# Altium PCB Konwerter_USB_RS232_4porty.PcbDoc
Units mil, origin at the board's own origin, x right, y up, seen from the top; angles counter-clockwise.
Board outline 6000 x 4000 mil, 4 copper layers (Top Layer, InternalPlane1, Internal Plane 2, Bottom Layer); 57 components, 106 nets, 328 pads, 162 vias.
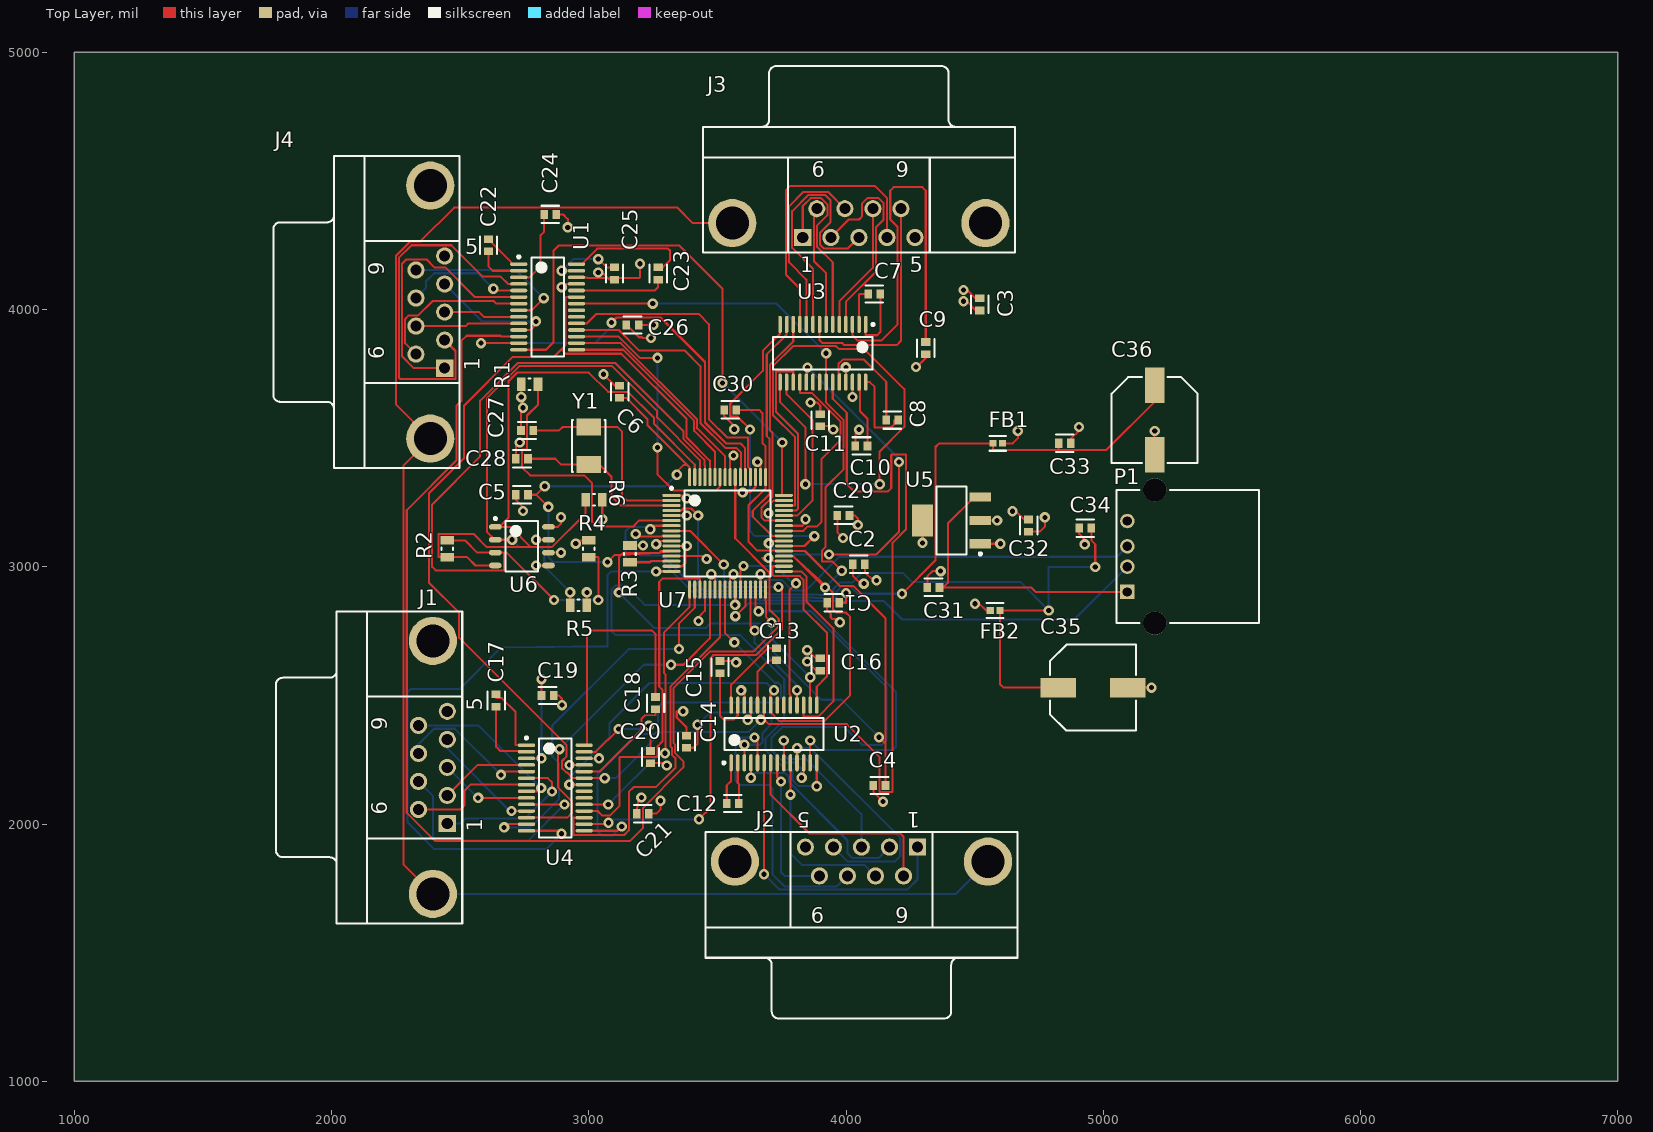
[diagram p0: Top Layer view]
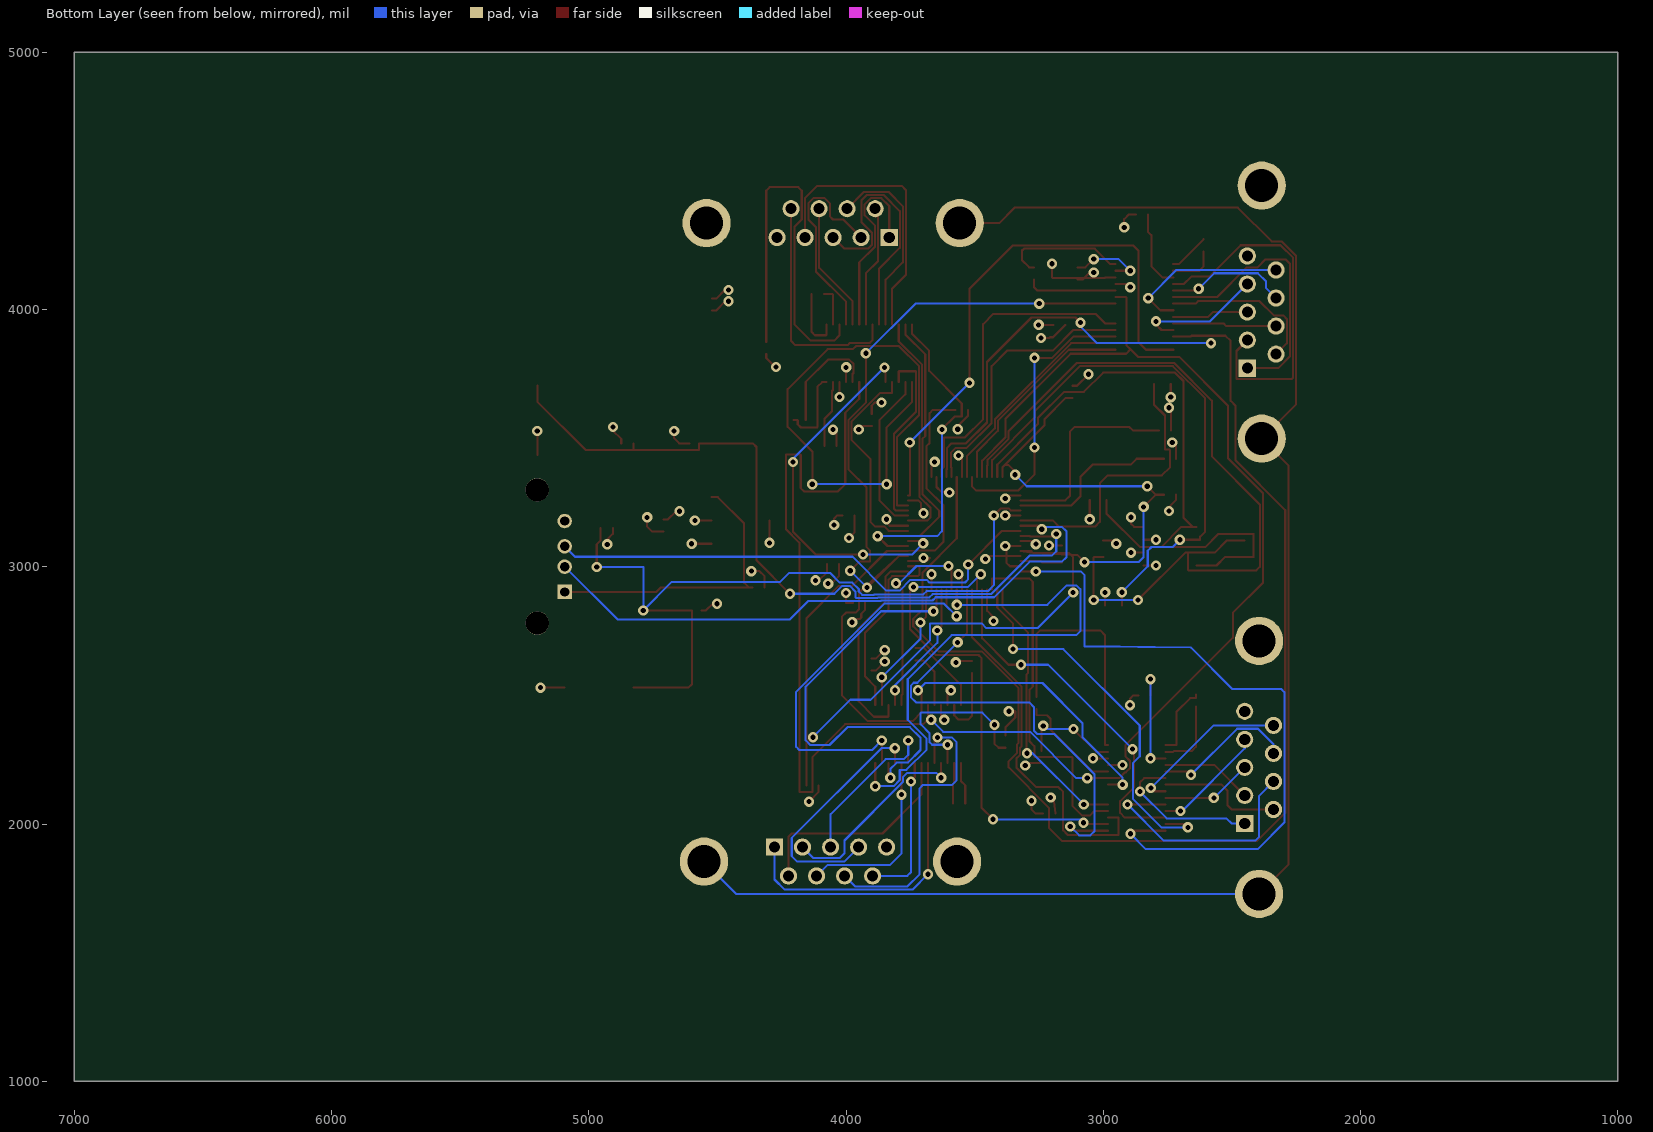
[diagram p1: Bottom Layer view, seen from below]
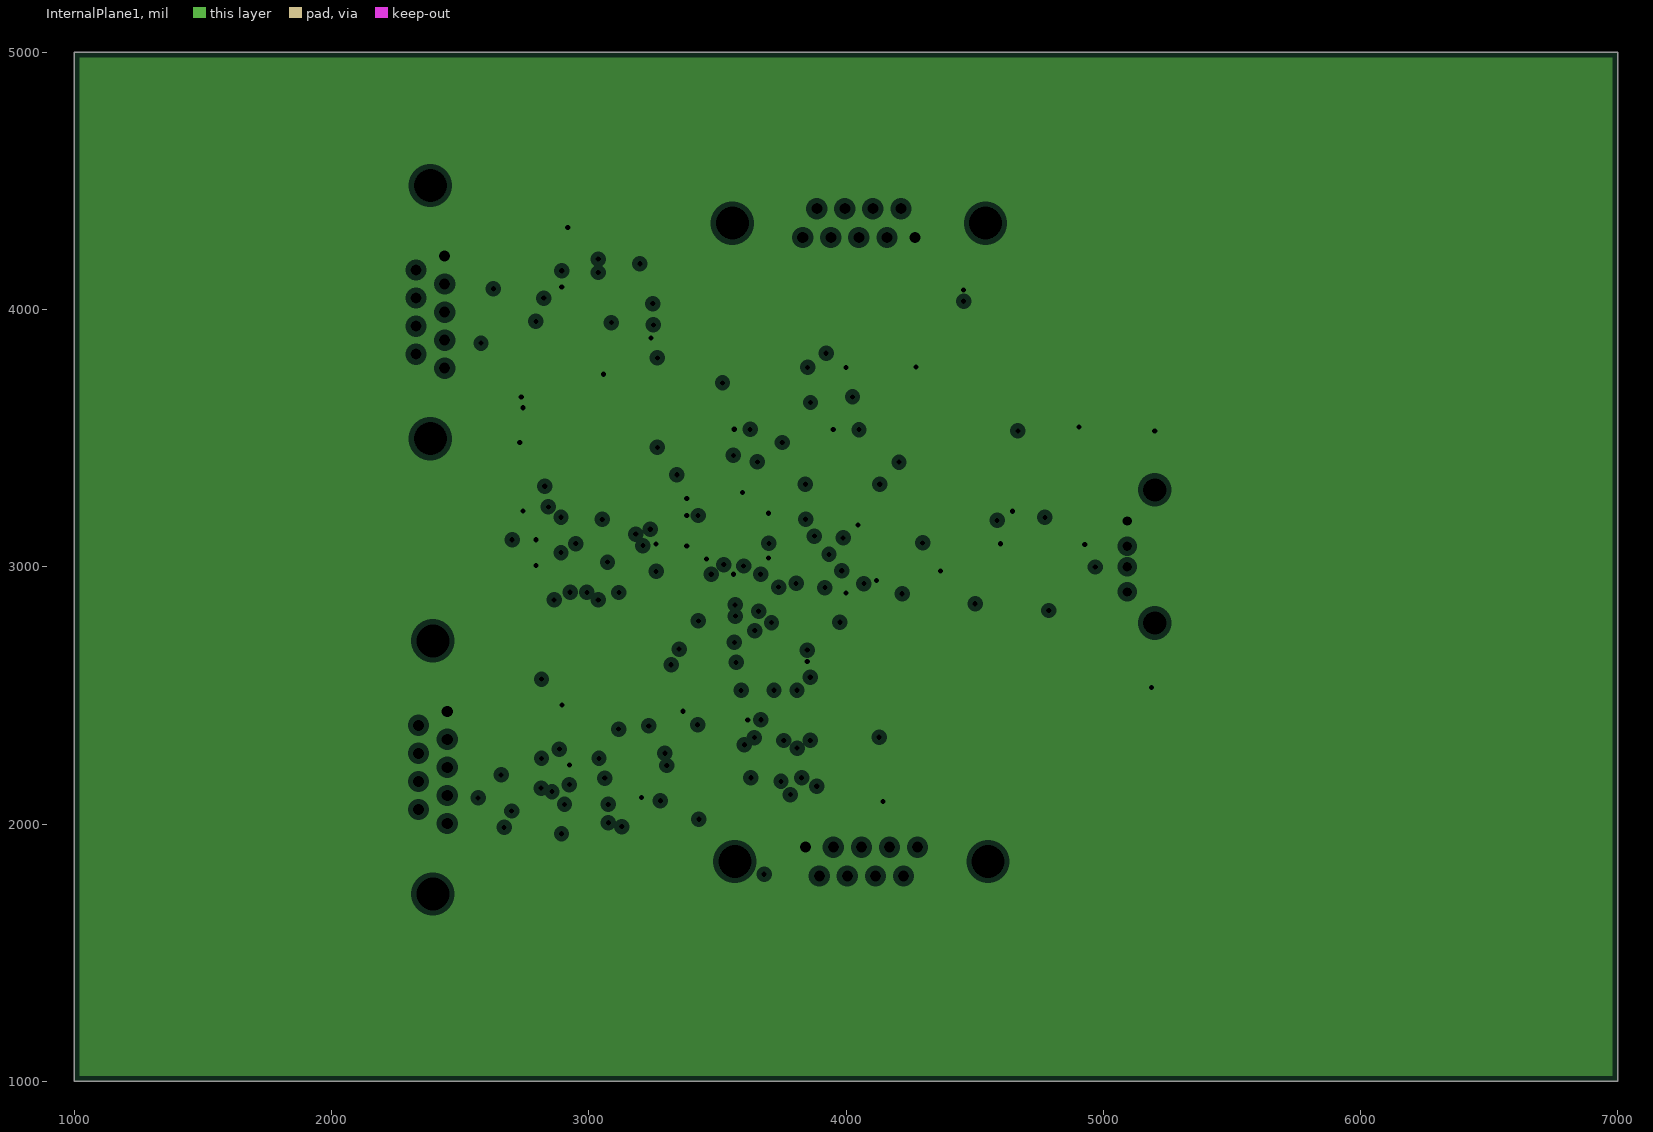
[diagram p2: InternalPlane1, clearances drawn from the general rule]
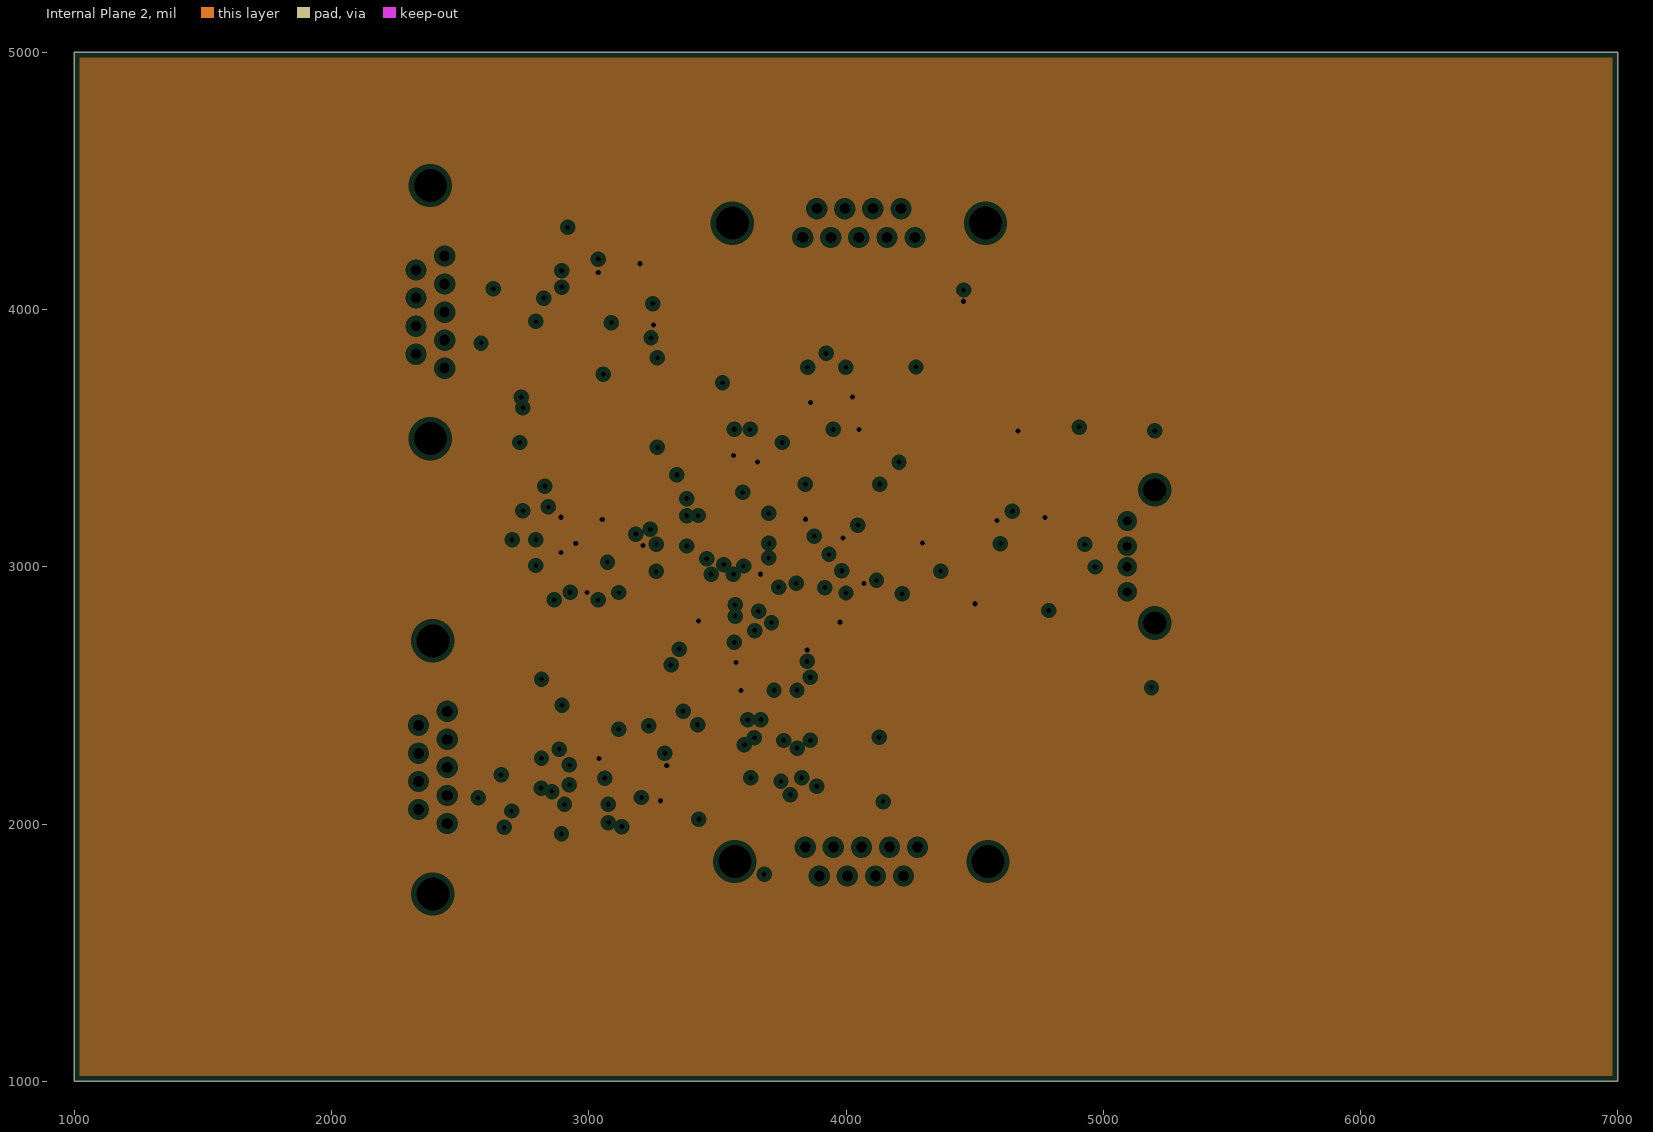
[diagram p3: Internal Plane 2, clearances drawn from the general rule]
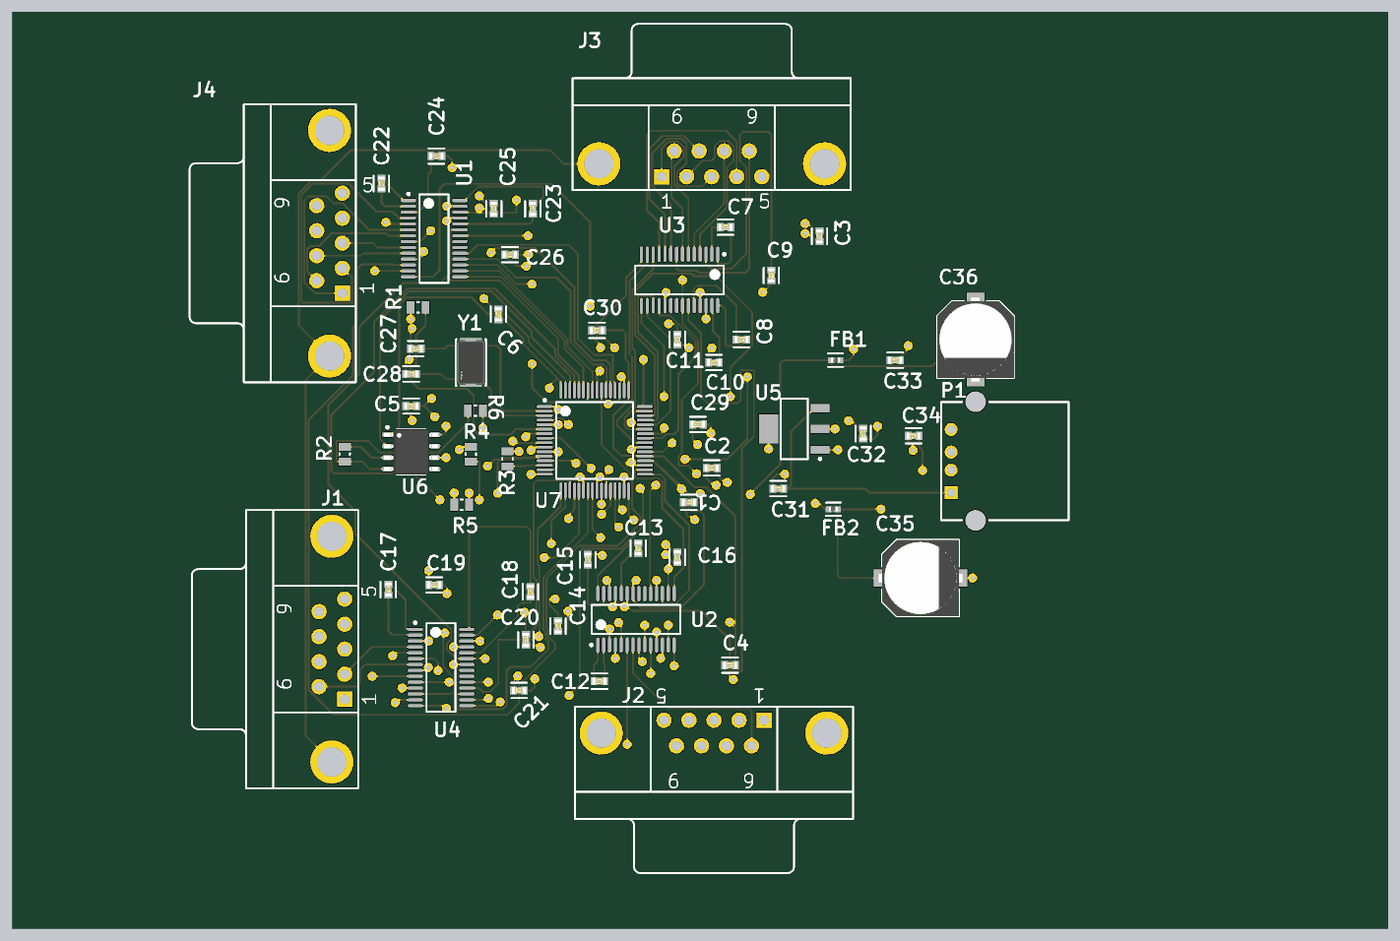
[diagram p4: 3D render of the assembled board from above, using the file's embedded part models]

## Layer stack, top to bottom
Top Layer: signal copper 1.4
Dielectric: core 12.6, FR-4, Dk 4.8
InternalPlane1: plane copper 1.4, net GND
Dielectric: prepreg 12.6, FR-4, Dk 4.8
Internal Plane 2: plane copper 1.4, net 3.3V
Dielectric: core 12.6, FR-4, Dk 4.8
Bottom Layer: signal copper 1.4

## Board outline
1000,1000 7000,1000 7000,5000 1000,5000

## Design rules (kind name [scope] priority, off if disabled: settings)
Clearance [All] p1: gap=4
HoleSize [All] p1: absolutevalues=TRUE maxlimit=1000 minlimit=1 maxpercent=80.000 minpercent=20.000
HoleToHoleClearance [All] p1: gap=8 allowstackedmicrovias=TRUE
MinimumSolderMaskSliver [All] p1: minsoldermaskwidth=1
PlaneClearance [All] p1: clearance=20
PlaneConnect [All] p1: planeconnectstyle=Relief reliefexpansion=20 reliefentries=4 reliefconductorwidth=10 reliefairgap=10
PolygonConnect [All] p1: connectstyle=Relief reliefconductorwidth=10 reliefentries=4 polygonreliefangle="90 Angle" airgapwidth=10
RoutingVias [All] p1: holewidth=20 width=40 viastyle="Through Hole" minholewidth=20 minwidth=40 maxholewidth=20 maxwidth=40
SilkToSilkClearance [All] p1: silktosilkclearance=8
SilkToSolderMaskClearance [IsPad] p1: minsilkscreentomaskgap=4 clearancetoexposedcopper=TRUE
SolderMaskExpansion [All] p1: expansion=4
Width [All] p1: maxlimit=8 minlimit=8 preferedwidth=8
21 further rules are at their usual default settings.

## Components (designator, comment, footprint, x,y, rotation, side; value= is the part's Value field where it differs from the comment)
C1 "100nF" FP-C0603C-CF-MFG 3950,2860 r0 top
C2 "100nF" FP-C0603C-CF-MFG 4050,3010 r0 top
C3 "100nF" FP-C0603C-CF-MFG 4520,4020 r90 top
C4 "100nF" FP-C0603C-CF-MFG 4130,2150 r180 top
C5 "100nF" FP-C0603C-CF-MFG 2740,3280 r180 top
C6 "100nF" FP-C0603C-CF-MFG 3120,3680 r90 top
C7 "100nF" FP-C0603C-CF-MFG 4110,4060 r180 top
C8 "100nF" FP-C0603C-CF-MFG 4180,3570 r180 top
C9 "100nF" FP-C0603C-CF-MFG 4310,3850 r270 top
C10 "100nF" FP-C0603C-CF-MFG 4060,3470 r0 top
C11 "100nF" FP-C0603C-CF-MFG 3900,3570 r90 top
C12 "100nF" FP-C0603C-CF-MFG 3560,2080 r0 top
C13 "100nF" FP-C0603C-CF-MFG 3730,2660 r270 top
C14 "100nF" FP-C0603C-CF-MFG 3380,2320 r90 top
C15 "100nF" FP-C0603C-CF-MFG 3510,2610 r270 top
C16 "100nF" FP-C0603C-CF-MFG 3900,2620 r90 top
C17 "100nF" FP-C0603C-CF-MFG 2640,2480 r270 top
C18 "100nF" FP-C0603C-CF-MFG 3260,2470 r270 top
C19 "100nF" FP-C0603C-CF-MFG 2840,2500 r0 top
C20 "100nF" FP-C0603C-CF-MFG 3240,2260 r90 top
C21 "100nF" FP-C0603C-CF-MFG 3210,2040 r0 top
C22 "100nF" FP-C0603C-CF-MFG 2610,4250 r270 top
C23 "100nF" FP-C0603C-CF-MFG 3270,4140 r270 top
C24 "100nF" FP-C0603C-CF-MFG 2850,4370 r0 top
C25 "100nF" FP-C0603C-CF-MFG 3100,4140 r90 top
C26 "100nF" FP-C0603C-CF-MFG 3170,3940 r0 top
C27 "27pF" FP-C0603C-CF-MFG 2760,3530 r180 top
C28 "27pF" FP-C0603C-CF-MFG 2740,3420 r180 top
C29 "100nF" FP-C0603C-CF-MFG 3990,3200 r0 top
C30 "100nF" FP-C0603C-CF-MFG 3550,3610 r180 top
C31 "100nF" FP-C0603C-CF-MFG 4340,2920 r180 top
C32 "100nF" FP-C0603C-CF-MFG 4710,3160 r90 top
C33 "100nF" FP-C0603C-CF-MFG 4850,3480 r0 top
C34 "100nF" FP-C0603C-CF-MFG 4930,3150 r180 top
C35 "2.7uF" NIC-UCL1V101MNL1GS_L 4960,2530 r0 top
C36 "2.7uF" NIC-UCL1V101MNL1GS_L 5200,3570 r270 top
FB1 "Koralik" FP-BLM15-0_05-IPC_A 4590,3480 r180 top
FB2 "Koralik" FP-BLM15-0_05-IPC_A 4580,2830 r0 top
J1 "D Connector 9" DSUB1.385-2H9 2020,2220 r90 top
J2 "D Connector 9" DSUB1.385-2H9 4060,1480 r180 top
J3 "D Connector 9" DSUB1.385-2H9 4050,4710 r0 top
J4 "D Connector 9" DSUB1.385-2H9 2010,3990 r90 top
P1 "USB-A1HSW6" OST_USB-A1HSW6 5350,3040 r90 top
R1 "12k" RESC2013X50X30LL20T20 2770,3710 r0 top
R2 "2.2k" RESC2013X50X30LL20T20 2450,3070 r270 top
R3 "1k" RESC2013X50X30LL20T20 3160,3050 r270 top
R4 "10k" RESC2013X50X30LL20T20 3000,3070 r90 top
R5 "10k" RESC2013X50X30LL20T20 2960,2850 r0 top
R6 "10k" RESC2013X50X30LL20T20 3020,3260 r0 top
U1 "MAX3241EUI" TSSOP28_N 2840,4010 r0 top
U2 "MAX3241EUI" TSSOP28_N 3720,2350 r90 top
U3 "MAX3241EUI" TSSOP28_N 3910,3830 r270 top
U4 "MAX3241EUI" TSSOP28_N 2870,2140 r0 top
U5 "LD1117S-3.3" SOT-223_L 4410,3180 r180 top
U6 "93C46" ATML-8S1_B_L 2740,3080 r0 top
U7 "FT4232HL-Reel" LQFP-64_N 3540,3130 r0 top
Y1 "12MHz" FP-7A-MFG 3000,3470 r270 top

## Footprints (in the part's own frame and the unit in brackets; to place one, negate y for a bottom-side part, rotate by r counter-clockwise, add the part's x,y. Pads: shape width x height; smd on the part's side, far side on the other; paste and mask are expansions set on the pad)
ATML-8S1_B_L [mm] "SOIC, 8-Leads, Body 5x4mm, Pitch 1.27mm, IPC High Density"
  oval 1.25x0.55 smd: 1(-2.625,1.905) 2(-2.625,0.635) 3(-2.625,-0.635) 4(-2.625,-1.905) 5(2.625,-1.905) 6(2.625,-0.635) 7(2.625,0.635) 8(2.625,1.905)
  silkscreen extent -2.75,-2.5 1.6,2.85, body extent -3,-2.5 3,2.5, height 1.75
DSUB1.385-2H9 [mm] "Connector; D Subminiature; 9 Position; Right Angle; Pitch 1.385 mm"
  rect 1.69x1.69 hole 1.09: 1(-5.54,-10.92)
  round 1.69 hole 1.09: 2(-2.77,-10.92) 3(0,-10.92) 4(2.77,-10.92) 5(5.54,-10.92) 6(-4.155,-8.08) 7(-1.385,-8.08) 8(1.385,-8.08) 9(4.155,-8.08)
  round 4.76 hole 3.26: 10(-12.495,-9.5) 11(12.495,-9.5)
  silkscreen extent -15.4,-12.4 15.4,6
FP-7A-MFG [mm]
  rect 1.7x2.4 smd paste+0 mask+0: 1(-1.85,0) 2(1.85,0)
  silkscreen extent -2.58,-1.67 2.58,1.67, body extent -2.8,-1.78 2.8,1.78, height 0.25
FP-BLM15-0_05-IPC_A [mil]
  rect 28.16x26.48 smd paste+0 mask+0: 1(-18.84,0) 2(18.84,0)
  silkscreen extent -33,-29 33,29, body extent -41,-21 41,21, height 10
FP-C0603C-CF-MFG [mm]
  rect 0.75x0.9 smd paste+0 mask+0: 1(-0.6,0) 2(0.6,0)
  silkscreen extent -0.87,-0.85 0.88,0.85, body extent -1.2,-0.6 1.2,0.6, height 0.25
LQFP-64_N [mm] "Thin QFP, 64-Leads, Body 10x10mm, Pitch 0.5mm, IPC Medium Density"
  oval 1.8x0.3 smd: 1(-5.55,3.75) 2(-5.55,3.25) 3(-5.55,2.75) 4(-5.55,2.25) 5(-5.55,1.75) 6(-5.55,1.25) 7(-5.55,0.75) 8(-5.55,0.25) 9(-5.55,-0.25) 10(-5.55,-0.75) 11(-5.55,-1.25) 12(-5.55,-1.75) 13(-5.55,-2.25) 14(-5.55,-2.75) 15(-5.55,-3.25) 16(-5.55,-3.75) 33(5.55,-3.75) 34(5.55,-3.25) 35(5.55,-2.75) 36(5.55,-2.25) 37(5.55,-1.75) 38(5.55,-1.25) 39(5.55,-0.75) 40(5.55,-0.25) 41(5.55,0.25) 42(5.55,0.75) 43(5.55,1.25) 44(5.55,1.75) 45(5.55,2.25) 46(5.55,2.75) 47(5.55,3.25) 48(5.55,3.75)
  oval 0.3x1.8 smd: 17(-3.75,-5.55) 18(-3.25,-5.55) 19(-2.75,-5.55) 20(-2.25,-5.55) 21(-1.75,-5.55) 22(-1.25,-5.55) 23(-0.75,-5.55) 24(-0.25,-5.55) 25(0.25,-5.55) 26(0.75,-5.55) 27(1.25,-5.55) 28(1.75,-5.55) 29(2.25,-5.55) 30(2.75,-5.55) 31(3.25,-5.55) 32(3.75,-5.55) 49(3.75,5.55) 50(3.25,5.55) 51(2.75,5.55) 52(2.25,5.55) 53(1.75,5.55) 54(1.25,5.55) 55(0.75,5.55) 56(0.25,5.55) 57(-0.25,5.55) 58(-0.75,5.55) 59(-1.25,5.55) 60(-1.75,5.55) 61(-2.25,5.55) 62(-2.75,5.55) 63(-3.25,5.55) 64(-3.75,5.55)
  silkscreen extent -5.67,-4.25 4.25,4.57, body extent -5,-5 5,5, height 1.6
NIC-UCL1V101MNL1GS_L [mm] "Aluminum Electrolytic Capacitor, Body 8.5x8.5x10.80mm, IPC High Density"
  rect 3.5x1.95 smd: 1(-3.425,0) 2(3.425,0)
  silkscreen extent -4.25,-4.25 4.25,4.25, body extent -4.65,-4.25 4.65,4.25, height 10.8
OST_USB-A1HSW6 [mm]
  rect 1.428x1.428 hole 0.92: 1(-3.5,6.51)
  round 1.428 hole 0.92: 2(-1,6.51) 3(1,6.51) 4(3.5,6.51)
  round 2.3 hole 2.3 unplated: ""(-6.57,3.8) ""(6.57,3.8)
  silkscreen extent -6.55,-6.5 6.55,7.6
RESC2013X50X30LL20T20 [mm] "Chip Resistor, 2-Leads, Body 2.00x1.25mm, IPC High Density"
  rect 0.85x1.35 smd: 1(-0.825,0) 2(0.825,0)
  silkscreen extent -0.1,-0.58 0.1,0.58, body extent -1.1,-0.72 1.1,0.72, height 0.5
SOT-223_L [mm] "SOT223, 4-Leads, Body 6.5x3.5mm, Pitch 2.3mm, Lead Span 7mm, IPC High Density"
  rect 2.1x0.9 smd: 1(-2.85,2.3) 2(-2.85,0) 3(-2.85,-2.3)
  rect 2.1x3.2 smd: 4(2.85,0)
  silkscreen extent -2.98,-3.35 1.5,3.42, body extent -1.85,-3.35 1.85,3.35, height 1.8
TSSOP28_N [mm] "TSOP, 28-Leads, Body 9.7x4.4mm, Pitch 0.65mm, IPC Medium Density"
  oval 1.7x0.35 smd: 1(-2.85,4.225) 2(-2.85,3.575) 3(-2.85,2.925) 4(-2.85,2.275) 5(-2.85,1.625) 6(-2.85,0.975) 7(-2.85,0.325) 8(-2.85,-0.325) 9(-2.85,-0.975) 10(-2.85,-1.625) 11(-2.85,-2.275) 12(-2.85,-2.925) 13(-2.85,-3.575) 14(-2.85,-4.225) 15(2.85,-4.225) 16(2.85,-3.575) 17(2.85,-2.925) 18(2.85,-2.275) 19(2.85,-1.625) 20(2.85,-0.975) 21(2.85,-0.325) 22(2.85,0.325) 23(2.85,0.975) 24(2.85,1.625) 25(2.85,2.275) 26(2.85,2.925) 27(2.85,3.575) 28(2.85,4.225)
  silkscreen extent -2.97,-4.9 1.6,5.07, body extent -2.25,-4.9 2.25,4.9, height 1.1

## Part data
C1 C2 C3 C4 C5 C6 C7 C8 C9 C10 C11 C12 C13 C14 C15 C16 C17 C18 C19 C20 C21 C22 C23 C24 C25 C26 C27 C28 C29 C30 C31 C32 C33 C34: library part CMP-2006-03061-2, "CAP CER 0.1UF 50V X7R 0603"
C35 C36: library part CMP-2000-07344-1, "Aluminum Electrolytic Capacitor, 100 uF, 35 V, 20%, -55 to 105 degC, 2-Pin SMD, RoHS, Tape and Reel"
FB1 FB2: library part CMP-0686-00232-4, "Chip Ferrite Bead, 0402, 220? @ 100MHz, 0.18?, 25%, 600mA"
J1 J2 J3 J4: "Receptacle Assembly, 9 Position, Right Angle"
P1: "USB-A _USB TYPE-A_  Receptacle Connector 4 Position Through Hole, Right Angle"
R1 R2 R3 R4 R5 R6: library part CMP-2001-04896-1
U1 U2 U3 U4: "3.0V TO 5.5V, Low-Power, up to 1Mbps, True RS-232 Transceiver Using Four 0.1µF External Capacitor"
U5: library part CMP-0244-00310-1, "Fixed Low Drop Positive Voltage Regulator, 3.3V, 4-Pin SOT-223, Tape and Reel"
U6: library part CMP-2000-05871-1, "Three-Wire Serial EEPROM, 2.7 to 5.5 V, -40 to 85 degC, 8-Pin SOIC, RoHS, Tube"
U7: "Quad High Speed USB To Multipurpose UART/MPSSE IC, LQFP-64, Tape and Reel"
Y1: library part CMP-18717-000115-1, "Quartz Crystal 48MHz, 30ppm, 12pF, 50?"

## Via types
v1: diameter 40, hole 20, Top Layer to Bottom Layer, 162 vias

## Nets (pads, with @x,y where several pads share a name; then routed paths per layer and width w, separated by ;. In a path a pad name is that pad's centre, name@x,y a point inside that pad or via, vN(x,y) a via of type N, cw(c..) or ccw(c..) an arc to the next point about the centre after c; other vN are vias at no path point)
1.8V: C4.1 C5.1 C6.1 C30.1 U7.12 U7.37 U7.49 U7.64 | length 5499.2
  Top Layer w8: C5.1 2796,3280 ; v1(2829,3313) 2796,3280 ; v1(2843,3233) 2796,3280 ; v1(3072.81,3018) 3100.81,3046 3125.5,3046 ; v1(3117,2900) 3117,3037.5 3125.5,3046 ; C6.1 3145.83,3656.38 3228.14,3574.07 3228.14,3550.14 3381.83,3396.45 ; v1(3342.36,3357.94) 3342.36,3369.42 3369.39,3396.45 3381.83,3396.45 ; U7.64 3392.36,3385.92 3381.83,3396.45 ; C30.1 3662.5,3610 3675,3597.5 3675,3481 3687.64,3468.36 U7.49 3687.64,3306 3621,3239.36 3621,3097.39 3655.39,3063 3725.17,3063 U7.37 3840.67,3061.1 3975.8,2925.97 4028,2925.97 4153.62,2800.35 4153.62,2312.38 ; v1(4128.62,2337.38) 4153.62,2312.38 ; C4.1 4153.62,2312.38 ; 3125.5,3046 3273.3,3054 ; 3125.5,3046 3133.5,3054 3273.3,3054 ; 3273.3,3054 3280.41,3061.1 U7.12 3273.3,3054
  Bottom Layer w8: v1(2829,3313) 3297.43,3313 v1(3342.36,3357.94) ; v1(2843,3233) 2843,3038 2863,3018 v1(3072.81,3018) ; v1(3117,2900) 3255.44,2761.56 3454.42,2761.56 3472.86,2780 3672,2780 3673,2779 3673,2714.5 3904.5,2483 3983,2483 v1(4128.62,2337.38)
3.3V: C1.1 C2.1 C3.1 C10.1 C11.2 C15.1 C16.2 C20.1 C21.2 C25.1 C26.2 C29.1 C32.1 FB1.1 FB2.1 R3.1 R4.2 R5.2 R6.2 U1.26 U2.26 U3.26 U4.26 U5.2 U5.4 U6.6 U6.8 U7.20 U7.31 U7.42 U7.50 U7.56 | length 2694.7
  Top Layer w8: U6.6 v1(2891.95,3055) ; U6.8 2879.45,3155 2891.95,3167.5 v1(2891.95,3192.5) ; v1(2949.42,3089.98) 2961.92,3102.48 R4.2 ; U1.26 2991.33,4125.16 2993.93,4122.56 3074.46,4122.56 ; U4.26 v1(3039.67,2255.16) ; R5.2 v1(2992.48,2900.58) ; v1(3037.03,4144) 3053.02,4144 3074.46,4122.56 ; v1(3052.48,3184.42) R6.2 ; C25.1 3080.64,4116.38 3074.46,4122.56 ; R3.1 v1(3210.58,3082.48) ; C26.2 3250.53,3940 v1(3251,3940.47) ; v1(3198.92,4178) 3198.92,4125.16 3196.32,4122.56 3074.46,4122.56 ; C21.2 3262.5,2040 3278.5,2056 v1(3278.5,2090.47) ; C20.1 3294.09,2236.38 v1(3302.97,2227.5) ; v1(3426.42,2789.56) 3426.42,2803.48 3451.42,2828.48 U7.20 ; C15.1 3567.85,2633.62 v1(3572.97,2628.5) ; U7.56 3549.84,3420.44 v1(3562.34,3432.94) ; v1(3592.34,2519.67) 3604.84,2507.17 U2.26 ; v1(3655.45,3407.94) 3667.95,3395.44 U7.50 ; U7.31 3667.95,2958.43 3655.45,2970.93 v1(3667.95,2970.93) ; U7.42 3830.44,3159.53 3842.94,3172.03 v1(3842.94,3184.53) ; v1(3849.53,2676) 3850.64,2676 3883.02,2643.62 C16.2 ; v1(3862.03,3638.5) 3887.5,3638.5 3900,3626 C11.2 ; C1.1 3926.38,2831.08 3940.63,2816.83 3940.63,2802.57 3946.18,2797.03 3976,2797.03 3988.5,2784.53 v1(3976,2784.53) ; C29.1 3966.38,3134.15 v1(3988.5,3112.03) ; v1(4025.16,3660.33) U3.26 ; C2.1 4026.38,2965.15 4057,2934.53 v1(4069.5,2934.53) ; C10.1 4036.38,3518.85 v1(4050.5,3532.97) ; v1(4297.8,3093.01) U5.4 ; v1(4457.03,4032) 4469.02,4032 4504.64,3996.38 C3.1 ; v1(4501.82,2856) 4518.62,2856 4544.62,2830 FB2.1 ; U5.2 v1(4587.54,3180) ; FB1.1 4648.38,3480 4668.18,3499.8 v1(4668.18,3528) ; C32.1 4753.17,3136.38 4772.97,3156.18 v1(4772.97,3192)
ADBUS0: U4.14 U7.16 | length 2693.3
  Top Layer w8: U4.14 2882.34,1973.66 v1(2894,1962) ; v1(3262,2982) 3262.36,2982.36 U7.16
  Bottom Layer w8: v1(2894,1962) 2834,1902 2400,1902 2296,2006 2296,2512.5 2308.5,2525 2498,2525 2660,2687 3072,2691 3072,2966.5 3087.5,2982 v1(3262,2982)
ADBUS1: U4.19 U7.17 | length 1077.6
  Top Layer w8: U4.19 v1(3076,2076.02) ; v1(3296,2275) 3298,2277 3298,2582 3292,2588 3292,2744 3392.36,2844.36 U7.17
  Bottom Layer w8: v1(3076,2076.02) 3274.98,2275 v1(3296,2275)
ADBUS2: U4.13 U7.18 | length 1520.8
  Top Layer w8: v1(2671,1987) 2683.25,1999.25 U4.13 ; v1(3351,2680) 3351,2779.95 3412.05,2841 U7.18
  Bottom Layer w8: v1(2671,1987) 2774,1987 2885,2098 2885,2236 2858,2263 2858,2383 3155,2680 v1(3351,2680)
ADBUS3: U4.18 U7.19 | length 1396.3
  Top Layer w8: U4.18 3034,2050.43 3051.19,2033.24 3082.81,2033.24 3120,2070.43 3120,2259 3121,2260 3266,2260 3268,2262 3268,2302.6 3286,2320.6 3286,2522 3274,2534 3274,2941.5 3287.5,2955 3430.73,2955 3431.73,2954 U7.19
ADBUS4: U4.12 U7.21 | length 1409.7
  Top Layer w8: U4.12 2915.84,2024.84 2934,2043 2934,2089 2880,2143 2880,2285 v1(2886,2291) ; v1(3320,2619) 3368.1,2619 3471.1,2722 U7.21
  Bottom Layer w8: v1(2886,2291) 3214,2619 v1(3320,2619)
ADBUS5: U4.16 U7.22 | length 1941.2
  Top Layer w8: U4.16 3070.75,1999.25 v1(3076.5,2005) ; v1(3428.3,2018.3) 3474,2064 3474,2646 3485,2657 3651.5,2657 3750.5,2756 3750.5,2908.5 v1(3738,2921) ; v1(3476,2971) 3490.79,2956.21 U7.22
  Bottom Layer w8: v1(3076.5,2005) 3089.8,2018.3 v1(3428.3,2018.3) ; v1(3476,2971) 3526,2921 v1(3738,2921)
ADBUS6: U4.17 U7.23 | length 1482.2
  Top Layer w8: U4.17 2941,2024.84 2940,2023.84 2940,1959 2941,1958 3139,1958 3156,1975 3156,2125 3174,2143 3261,2143 3337.5,2219.5 3337.5,2254.5 3324.08,2267.92 3324.08,2295.52 3317,2302.6 3317,2533.63 3510.47,2727.1 U7.23
ADBUS7: U4.15 U7.24 | length 1897.4
  Top Layer w8: U4.15 3111.66,1973.66 v1(3128,1990) ; U7.24 3530.16,2741.84 v1(3566,2706)
  Bottom Layer w8: v1(3128,1990) 3094,1956 3050,1956 3034,1972 3034,2193 3191,2350 3256.5,2350 3269,2362.5 3269,2454.5 3287.5,2473 3728,2473 3748,2493 3748,2538 3737,2549 3723,2549 v1(3566,2706)
BDBUS0: U2.14 U7.26 | length 2164.8
  Top Layer w8: v1(3569,2852) 3569.53,2852.53 U7.26 ; v1(3886.34,2147) U2.14
  Bottom Layer w8: v1(3569,2852) 3217.6,2852 3141.6,2928 3104.5,2928 3089,2912.5 3089,2750 3104.83,2734.17 3589.02,2734.17 3760,2563.19 3760,2405.21 3686.79,2332 3686.79,2289.21 3765.24,2210.76 3790,2210.76 3791,2209.76 3791,2171 3815,2147 v1(3886.34,2147)
BDBUS1: U2.19 U7.27 | length 819.9
  Top Layer w8: U7.27 3589.21,2942.93 3590.34,2944.06 3590.34,3002 3591.34,3003 v1(3601.71,3003) ; U2.19 3783.98,2501 3781,2503.98 3781,2910.5 v1(3806,2935.5)
  Bottom Layer w8: v1(3601.71,3003) 3726,3003 3793.5,2935.5 v1(3806,2935.5)
BDBUS2: U2.13 U7.28 | length 1561.1
  Top Layer w8: v1(3570,2808) 3608.9,2846.9 U7.28 ; U2.13 v1(3860.75,2325)
  Bottom Layer w8: v1(3570,2808) 3618.89,2856.89 3851.11,2856.89 4194,2514 4194,2300 4181.5,2287.5 3898.25,2287.5 v1(3860.75,2325)
BDBUS3: U2.18 U7.29 | length 524.3
  Top Layer w8: U7.29 3628.58,2768.42 v1(3645,2752) ; U2.18 v1(3809.57,2520)
  Bottom Layer w8: v1(3645,2752) 3645,2704.39 3809.57,2539.83 v1(3809.57,2520)
BDBUS4: U2.12 U7.30 | length 1706.5
  Top Layer w8: U7.30 3648.27,2839.23 v1(3660.5,2827) ; v1(3827.48,2180) 3835.16,2187.67 U2.12
  Bottom Layer w8: v1(3660.5,2827) 3864,2827 4156.84,2534.16 4156.84,2325 4138.84,2307 4064,2307 3994.26,2376.74 3751.52,2376.74 3710.5,2335.72 3710.5,2287.5 3759.73,2238.27 3803,2238.27 3827.48,2213.79 v1(3827.48,2180)
BDBUS5: U2.16 U7.32 | length 521
  Top Layer w8: U7.32 3687.64,2867.5 3688.5,2866.64 3688.5,2805 v1(3710.5,2783) ; U2.16 v1(3860.75,2570.25)
  Bottom Layer w8: v1(3710.5,2783) 3710.5,2720.5 v1(3860.75,2570.25)
BDBUS6: U2.17 U7.33 | length 810.3
  Top Layer w8: U7.33 3826.14,2982.36 3846,2962.5 3846,2866 3951,2761 3951,2476.5 3891.5,2417 3836.16,2417 3835.16,2418 U2.17
BDBUS7: U2.15 U7.34 | length 745.2
  Top Layer w8: U7.34 3716,3002.05 3715,3001.05 3715,2969 3720.5,2963.5 3820.5,2963.5 3834,2950 3834,2835 3926,2743 3926,2573.66 3886.34,2534 U2.15
CDBUS0: U3.14 U7.38 | length 1324
  Top Layer w8: v1(3627,3534) 3577,3584 3551,3584 3550,3585 3550,3634.72 3677,3761.72 3677,3840 3743.66,3906.66 U3.14 ; U7.38 3838.79,3080.79 v1(3877,3119)
  Bottom Layer w8: v1(3627,3534) 3627,3137.5 3645.5,3119 v1(3877,3119)
CDBUS1: U3.19 U7.39 | length 1467.9
  Top Layer w8: v1(3700,3091) 3709.47,3100.47 U7.39 ; U3.19 3846.02,3770.57 v1(3850.48,3775.02) ; v1(3933.91,3047.86) 4117.36,3047.86 4206,3136.5 v1(4206,3407)
  Bottom Layer w8: v1(3700,3091) 3743.14,3047.86 v1(3933.91,3047.86) ; v1(3850.48,3775.02) 4206,3419.5 v1(4206,3407)
CDBUS2: U3.13 U7.40 | length 962.8
  Top Layer w8: U7.40 3712.5,3120.16 3637.53,3195.13 3637.53,3217.53 3703,3283 3703,3497 3692,3508 3692,3825.87 3769.25,3903.12 U3.13
CDBUS3: U3.18 U7.41 | length 827.3
  Top Layer w8: U7.41 3834.24,3139.84 3851.74,3157.34 3887.5,3157.34 3905,3174.84 3905,3419.67 3979,3493.67 3979,3564.19 3868.19,3675 3821.43,3675 U3.18
CDBUS4: U3.12 U7.43 | length 902.8
  Top Layer w8: U7.43 3684.79,3179.21 3671,3193 3671,3228.5 3715,3272.5 3715,3520 3704,3531 3704,3785 3794.84,3875.84 U3.12
CDBUS5: U3.16 U7.44 | length 636.9
  Top Layer w8: U7.44 3809.84,3198.9 3870,3259.06 3870,3570 3769.25,3670.75 U3.16
CDBUS6: U3.17 U7.45 | length 735.7
  Top Layer w8: U7.45 3806,3218.58 3814,3226.58 3814,3516.01 3728,3602.01 3728,3759 3729,3760 3793.84,3760 3794.84,3759 U3.17
CDBUS7: U3.15 U7.46 | length 2368.5
  Top Layer w8: U3.15 3743.66,3640 3842,3541.66 v1(3842,3321) ; U7.46 3801,3238.27 3802,3239.27 3802,3504 3716,3590 3716,3780 3794,3858 3961,3858 3973,3846 4071,3846 4227,3690 4227,3544 4131,3448 v1(4131,3321)
  Bottom Layer w8: v1(3842,3321) v1(4131,3321)
CTS1: J1.8 U4.5 | length 559.8
  Top Layer w8: v1(2659,2191) 2671.98,2203.98 U4.5
  Bottom Layer w8: J1.8 2338.11,2310 2398.43,2370.32 2479.68,2370.32 v1(2659,2191)
CTS2: J2.8 U2.5 | length 1152
  Top Layer w8: v1(3644,2336) 3656.02,2323.98 U2.5
  Bottom Layer w8: v1(3644,2336) 3587.5,2336 3571,2319.5 3571,2168.5 3587.5,2152 3700.5,2152 3715,2137.5 3715,1803 3761.16,1756.84 3964.2,1756.84 J2.8
CTS3: J3.8 U3.5 | length 503.8
  Top Layer w8: U3.5 3973.98,4031.98 4104.53,4162.53 J3.8
CTS4: J4.8 U1.5 | length 482.4
  Top Layer w8: v1(2629,4080.98) 2636,4073.98 U1.5
  Bottom Layer w8: J4.8 2367,4083.42 2367,4109 2399,4141 2568.98,4141 v1(2629,4080.98)
DCD1: J1.1 U4.6 | length 600.8
  Top Layer w8: U4.6 2841.11,2178.39 2857,2162.5 v1(2857,2126)
  Bottom Layer w8: J1.1 2501,2001.89 2521.11,2022 2753,2022 v1(2857,2126)
DCD2: J2.1 U2.6 | length 1196.4
  Top Layer w8: v1(3681.61,1804.89) U2.6
  Bottom Layer w8: v1(3681.61,1804.89) 3741.66,1744.84 4238.84,1744.84 4278.11,1784.11 J2.1
DCD3: J3.1 U3.6 | length 750
  Top Layer w8: J3.1 3831.89,4402.55 3862.5,4433.16 3903.51,4433.16 3927.69,4408.98 3927.69,4365.81 3887,4325.12 3887,4245 3948.39,4183.61 U3.6
DCD4: J4.1 U1.6 | length 1066.5
  Top Layer w8: J4.1 2319.91,3771.89 2274,3817.8 2274,4177.71 2291.29,4195 2369,4195 2400,4164 2442.11,4164 2557.73,4048.39 U1.6
DDBUS0: U1.14 U7.48 | length 2144.2
  Top Layer w8: U1.14 2833.66,3843.66 2863,3873 2863,4229 2883,4249 3352,4249 3520,4081 v1(3520,3715) ; v1(3752,3483) 3752,3277.64 U7.48
  Bottom Layer w8: v1(3520,3715) v1(3752,3483)
DDBUS1: U1.19 U7.52 | length 1255.6
  Top Layer w8: U1.19 2993,3946.02 3029.98,3983 3427.5,3983 3467,3943.5 3467,3573.42 3537.42,3503 3618,3503 3619,3502 3619,3388.58 3628.58,3379 U7.52
DDBUS2: U1.13 U7.53 | length 1686.8
  Top Layer w8: v1(2581,3869.25) U1.13 ; v1(3088,3949) 3108,3969 3279,3969 3452,3796 3452,3561 3534,3479 3590.5,3479 3607,3462.5 3607,3379 3608.9,3379 U7.53
  Bottom Layer w8: v1(2581,3869.25) 3024.25,3869.25 3088,3933 v1(3088,3949)
DDBUS3: U1.18 U7.54 | length 1062.4
  Top Layer w8: U1.18 3116.57,3920.43 3197,3840 3374,3840 3434,3780 3434,3559 3532,3461 3575,3461 3591,3445 3591,3386 3589.21,3384.21 U7.54
DDBUS4: U1.12 U7.55 | length 4923.8
  Top Layer w8: U1.12 2660,3894.84 2656.84,3898 2525,3898 2505,3878 2505,3645 2486,3626 2486,3414 2292.31,3220.31 2292.31,2043.69 2402.84,1933.16 3159.16,1933.16 3210,1984 3210,2061.98 3367.97,2219.96 3367.97,2243.36 3336.08,2275.25 3336.08,2308.15 3329.64,2314.6 3329.64,2529.18 3470.56,2670.11 3640.11,2670.11 3738.5,2768.5 3738.5,2797.5 3702.55,2833.45 3702.55,2977.45 3569.53,3110.47 U7.55
DDBUS5: U1.16 U7.57 | length 861.2
  Top Layer w8: U1.16 3124.75,3869.25 3421.54,3572.46 3421.54,3537.96 3530.16,3429.34 U7.57
DDBUS6: U1.17 U7.58 | length 1113.4
  Top Layer w8: U1.17 3116.13,3894.84 3198.97,3812 v1(3267,3812) ; v1(3267,3464) 3267,3359.5 3329.5,3297 3494.97,3297 3510.47,3312.5 U7.58
  Bottom Layer w8: v1(3267,3464) v1(3267,3812)
DDBUS7: U1.15 U7.59 | length 824.4
  Top Layer w8: U1.15 3133.37,3843.66 3409.54,3567.49 3409.54,3528.19 3490.79,3446.94 U7.59
DSR1: J1.6 U4.7 | length 492.8
  Top Layer w8: J1.6 2500,2056.42 2517,2073.42 2517,2130 2539.8,2152.8 U4.7
DSR2: J2.6 U2.7 | length 860
  Top Layer w8: U2.7 3707.2,2114 3858.2,1963 4210.58,1963 4223.58,1950 J2.6
DSR3: J3.6 U3.7 | length 480.9
  Top Layer w8: J3.6 3886.42,4362.62 3875,4362.62 3875,4188.8 3922.8,4141 U3.7
DSR4: J4.6 U1.7 | length 629
  Top Layer w8: J4.6 2286,3868.53 2286,3963 2300,3977 2337,3977 2393,4033 2630,4033 2640.2,4022.8 U1.7
DTR1: J1.4 U4.11 | length 443.8
  Top Layer w8: v1(2700,2050.43) U4.11
  Bottom Layer w8: J1.4 2449.92,2294.01 2693.5,2050.43 v1(2700,2050.43)
DTR2: J2.4 U2.11 | length 965.9
  Top Layer w8: U2.11 3809.57,2294.57 v1(3810,2295)
  Bottom Layer w8: v1(3810,2295) 3862,2295 4211,1946 4211,1875 4190,1854 4006.87,1854 J2.4
DTR3: J3.4 U3.11 | length 1116.5
  Top Layer w8: U3.11 3820.43,4081.57 3766.62,4135.38 3766.62,4463.62 3783.8,4480.8 4112.2,4480.8 4159.06,4433.94 J3.4
DTR4: J4.4 U1.11 | length 502.6
  Top Layer w8: U1.11 2773.43,3920.43 2794.5,3941.5 v1(2794.5,3954)
  Bottom Layer w8: J4.4 2584.98,3954 v1(2794.5,3954)
GND: C1.2 C2.2 C3.2 C4.2 C5.2 C6.2 C9.2 C11.1 C14.2 C16.1 C19.2 C21.1 C24.2 C26.1 C27.2 C28.2 C29.2 C30.2 C31.2 C32.2 C33.2 C34.2 C35.2 C36.2 J1.5 J2.5 J3.5 J4.5 P1.4 R1.1 U1.25 U2.25 U3.25 U4.25 U5.1 U6.5 U6.7 U7.1 U7.5 U7.10 U7.11 U7.13 U7.15 U7.25 U7.35 U7.47 U7.51 | length 3343.4
  Top Layer w8: C5.2 2716.38,3260.64 2744,3233.02 v1(2744,3217.03) ; C28.2 2716.38,3481.35 2718,3482.97 v1(2731.5,3482.97) ; C27.2 2736.38,3597.85 2744,3605.47 v1(2744,3617.97) ; v1(2737.52,3659.42) R1.1 ; v1(2794.74,3005) U6.5 ; v1(2794.74,3105) U6.7 ; C19.2 2883.5,2500 2896,2487.5 v1(2896,2462.03) ; C24.2 2900,4370 2918.5,4351.5 v1(2918.5,4319.53) ; v1(2894.74,4087.07) 2907.24,4099.57 U1.25 ; v1(2924.74,2229.57) U4.25 ; v1(3057.03,3748.5) 3101.91,3703.62 C6.2 ; C26.1 3147.4,3940 3195.18,3892.22 3206.83,3892.22 3209,3890.05 3228.98,3890.05 3242,3877.03 v1(3242,3889.53) ; C21.1 3193,2102.97 v1(3204.5,2102.97) ; v1(3262.06,3087.97) 3274.56,3100.47 U7.10 ; U7.15 3362.5,3002.05 3376.68,3016.22 3376.68,3041.42 ; U7.13 3376.68,3041.42 ; U7.11 v1(3380.93,3080.79) 3376.68,3076.53 3376.68,3041.42 ; U7.5 v1(3380.93,3198.9) ; U7.1 3368.43,3277.64 v1(3380.93,3265.14) ; v1(3367.03,2438.5) 3343.53,2438.5 3342.03,2437 3342.03,2413.97 3380,2376 C14.2 ; v1(3458.18,3030.5) 3447.27,3041.42 3376.68,3041.42 ; C30.2 3526.38,3586.15 3565.5,3547.03 v1(3565.5,3534.53) ; U7.25 3549.84,2969.77 3551,2970.93 v1(3562.34,2970.93) ; v1(3598.27,3289.07) 3610.77,3289.07 3612.7,3291 3629,3291 3648.27,3310.27 U7.51 ; v1(3617.93,2404.74) 3630.43,2417.24 U2.25 ; v1(3699.07,3034.23) 3674.07,3034.23 3686.57,3021.73 U7.35 ; v1(3699.07,3207.95) 3708.15,3217.03 3708.15,3246.55 3719.55,3257.95 U7.47 ; v1(3849.53,2632) 3849.02,2632 3884.64,2596.38 C16.1 ; C11.1 3938.09,3546.38 v1(3950.47,3534) ; C1.2 3999,2860 4000,2861 v1(4000,2897.97) ; U3.25 v1(3999.57,3775.26) ; C29.2 4033.5,3200 4046,3187.5 v1(4046,3162.03) ; C2.2 4073.62,2979.41 4106,2947.03 v1(4118.5,2947.03) ; C4.2 4106.38,2124.65 v1(4144,2087.03) ; v1(4272.03,3776.5) 4284.53,3789 4287.5,3789 4310,3811.5 C9.2 ; C31.2 4316.38,2963.17 4336.18,2982.97 v1(4368,2982.97) ; v1(4457.03,4076) 4470.64,4076 4503.02,4043.62 C3.2 ; U5.1 v1(4600.04,3089.45) ; v1(4647.03,3216) 4660.64,3216 4693.02,3183.62 C32.2 ; C33.2 4873.62,3496.98 4906,3529.36 v1(4906,3542.97) ; C34.2 4906.38,3127.64 4928,3106.02 v1(4928,3087.03) ; C35.2 v1(5187.74,2530) ; C36.2 v1(5200,3528.06)
NetC7_1: C7.1 U3.1 | length 251.6
  Top Layer w8: U3.1 4076.34,3901 4077.34,3900 4121.12,3900 4133.62,3912.5 C7.1
NetC7_2: C7.2 U3.2 | length 152.8
  Top Layer w8: U3.2 4050.75,4059 4051.75,4060 C7.2
NetC8_1: C8.1 U3.28 | length 313.2
  Top Layer w8: U3.28 4076.34,3718 4093,3718 4111,3700 4111,3543 4112.5,3541.5 4175,3541.5 4187.5,3554 4187.5,3569 4188.5,3570 C8.1
NetC8_2: C8.2 U3.24 | length 449.7
  Top Layer w8: U3.24 3973.98,3751 3972,3751 3971,3752 3971,3788.5 3987.5,3805 4070,3805 4156.38,3718.62 C8.2
NetC9_1: C9.1 U3.3 | length 1522.8
  Top Layer w8: U3.3 4025.16,3900 4046.16,3879 4137,3879 4201,3943 4201,4321 4172,4350 4172,4462.5 4185.5,4476 4296.5,4476 4310,4462.5 C9.1
NetC10_2: C10.2 U3.27 | length 263.3
  Top Layer w8: U3.27 4050.75,3685 4054,3685 4054,3605.62 4083.62,3576 C10.2
NetC12_1: C12.1 U2.1 | length 165
  Top Layer w8: C12.1 3536.38,2150 3553.66,2167.28 U2.1
NetC12_2: C12.2 U2.2 | length 159.6
  Top Layer w8: U2.2 3579.25,2160.37 3583.62,2156 C12.2
NetC13_1: C13.1 U2.28 | length 314.6
  Top Layer w8: U2.28 3553.66,2541.66 3695.62,2683.62 C13.1
NetC13_2: C13.2 U2.24 | length 222.4
  Top Layer w8: U2.24 3656.02,2592.4 3700,2636.38 C13.2
NetC14_1: C14.1 U2.3 | length 703.1
  Top Layer w8: C14.1 3406.88,2296.38 3423,2312.5 v1(3423,2386) ; U2.3 v1(3604.84,2308)
  Bottom Layer w8: v1(3423,2386) 3470,2433 3709,2433 3710,2432 3710,2387.21 3674.79,2352 3674.79,2317.79 3665,2308 v1(3604.84,2308)
NetC15_2: C15.2 U2.27 | length 287.2
  Top Layer w8: C15.2 3510,2421 3525,2406 3562.5,2406 3579.25,2422.75 U2.27
NetC17_1: C17.1 U4.1 | length 283.3
  Top Layer w8: C17.1 2640,2489 2662.5,2489 2715,2436.5 2715,2307.34 U4.1
NetC17_2: C17.2 U4.2 | length 282.1
  Top Layer w8: C17.2 2640,2300 2657,2283 2725.75,2283 2728,2280.75 U4.2
NetC18_1: C18.1 U4.28 | length 963.6
  Top Layer w8: U4.28 2993,2306.34 2993,2734 3012,2753 3244.5,2753 3260,2737.5 C18.1
NetC18_2: C18.2 U4.24 | length 416.4
  Top Layer w8: U4.24 3042.98,2203.98 3205,2366 3205,2408.5 3218.5,2422 3260,2423 C18.2
NetC19_1: C19.1 U4.3 | length 429.4
  Top Layer w8: U4.3 v1(2816.38,2255.16) ; C19.1 v1(2816.38,2563)
  Bottom Layer w8: v1(2816.38,2255.16) v1(2816.38,2563)
NetC20_2: C20.2 U4.27 | length 393.3
  Top Layer w8: U4.27 3027.75,2280.75 v1(3116,2369) ; v1(3233,2381.5) 3240,2374.5 C20.2
  Bottom Layer w8: v1(3116,2369) 3220.5,2369 v1(3233,2381.5)
NetC22_1: C22.1 U1.1 | length 158.5
  Top Layer w8: C22.1 2610,4273 2706.66,4176.34 U1.1
NetC22_2: C22.2 U1.2 | length 183.6
  Top Layer w8: C22.2 2610,4167.5 2626.75,4150.75 U1.2
NetC23_1: C23.1 U1.28 | length 486.7
  Top Layer w8: U1.28 2972,4176.34 3032.66,4237 3308,4237 3315.62,4229.38 3315.62,4191.62 3287.62,4163.62 C23.1
NetC23_2: C23.2 U1.24 | length 352.3
  Top Layer w8: U1.24 3256.48,4073.98 3270,4087.5 C23.2
NetC24_1: C24.1 U1.3 | length 310.4
  Top Layer w8: U1.3 2770,4125.16 2813,4168.16 2813,4289.22 2826.38,4302.6 C24.1
NetC25_2: C25.2 U1.27 | length 294.4
  Top Layer w8: v1(2895,4151) 2895.25,4150.75 U1.27 ; v1(3037,4196) 3069.38,4163.62 C25.2
  Bottom Layer w8: v1(2895,4151) 2940,4196 v1(3037,4196)
NetC27_1: C27.1 U7.2 Y1.1 | length 807.8
  Top Layer w8: C27.1 2885,3530 2897.83,3542.83 Y1.1 3112.5,3542.83 3130,3525.33 3130,3275 3147.05,3257.95 U7.2
NetC28_1: C28.1 U7.3 Y1.2 | length 677.7
  Top Layer w8: C28.1 2870,3420 2892.83,3397.17 Y1.2 3041.83,3397.17 3088,3351 3088,3275 3124.73,3238.27 U7.3
NetC33_1: C33.1 C36.1 FB1.2 U7.9 | length 3041.9
  Top Layer w8: v1(3182.58,3127) 3191.58,3118 3283.84,3118 3286,3120.16 U7.9 ; v1(4218,2895) 4348,3025 4348,3465.5 4362.5,3480 FB1.2 4571.16,3454 4827.38,3454 ; C33.1 4826.38,3455 4827.38,3454 ; C36.1 5200,3642 5012,3454 4827.38,3454
  Bottom Layer w8: v1(3182.58,3127) 3182.58,3060.42 3200,3043 3286.61,3043 3436.13,2893.47 3663.08,2893.47 3675.66,2880.89 3875.11,2880.89 3877.01,2878.99 3961.42,2878.99 3963.32,2880.89 3963.32,2903.82 3985.47,2925.97 4014.53,2925.97 4045.5,2895 v1(4218,2895)
NetC34_1: C34.1 C35.1 FB2.2 U7.4 | length 3084
  Top Layer w8: U7.4 3359.58,3218.58 3368,3227 3397.5,3227 v1(3425.25,3199.25) ; v1(4788,2830) FB2.2 4598.84,2543.66 4612.5,2530 C35.1 ; C34.1 4953.62,3102.38 4969,3087 v1(4969,2999)
  Bottom Layer w8: v1(3425.25,3199.25) 3425.25,2928.36 3448.13,2905.47 3686.55,2905.47 3699.13,2892.89 3889.01,2892.89 3890.91,2890.99 3937.5,2890.99 3950.42,2903.9 3950.42,2913.44 3974.95,2937.97 4024,2937.97 4062.03,2976 4221,2976 4256,2941 4677,2941 v1(4788,2830) 4788,2999 v1(4969,2999)
NetP1_2: P1.2 U7.7 | length 2431.4
  Top Layer w8: v1(3239,3146) 3252.53,3159.53 U7.7
  Bottom Layer w8: v1(3239,3146) 3230,3155 3160.5,3155 3143,3137.5 3143,3037.5 3160.5,3020 3285.61,3020 3424.13,2881.47 3651.08,2881.47 3663.66,2868.89 3863.11,2868.89 3865.01,2866.99 4146.51,2866.99 4218.5,2795 4888.07,2795 P1.2
NetP1_3: P1.3 U7.8 | length 1981.3
  Top Layer w8: U7.8 3393.66,3139.84 v1(3525,3008.5)
  Bottom Layer w8: v1(3525,3008.5) 3525,2951.5 3537.5,2939 3676.55,2939 3686.55,2949 3750,2949 3791.5,2907.5 3842.91,2907.5 3974.41,3039 5053.33,3039 P1.3
NetR1_2: R1.2 U7.6 | length 1132.6
  Top Layer w8: R1.2 2802.48,3630.48 2760,3588 2760,3457 2759,3456 2743,3456 2740,3453 2740,3387.5 2772.5,3355 2983,3355 3013,3325 3013,3175 3032,3156 3171.79,3156 3195,3179.21 U7.6
NetR2_1: R2.1 R4.1 U6.3 U7.61 | length 3136.8
  Top Layer w8: R2.1 2519,3102.48 2566.48,3055 U6.3 2669,3055 ; v1(2865,2871) 2681,3055 2669,3055 ; R4.1 3036,3037.52 3037,3036.52 v1(3037,2871) ; U7.61 3451.42,3392.87 3449.26,3395.02 3449.26,3416.31 3368,3497.57 3368,3527.87 3103.71,3792.15 2724.18,3792.15 2578,3645.97 2578,3429 2391,3242 2391,3000 2405,2986 2669,2986 2670,2987 2670,3054 2669,3055
  Bottom Layer w8: v1(2865,2871) v1(3037,2871)
NetR2_2: R2.2 R6.1 U6.1 U6.4 U7.63 | length 2726.4
  Top Layer w8: U6.4 2559.52,3005 2527,3037.52 R2.2 2416,3037.52 2415,3038.52 2415,3127 2416,3128 2552,3128 2604,3076 2775,3076 ; U6.1 U6.1@2653,3155 ; R6.1 2987.52,3207 2856.52,3076 2775,3076 ; U7.63 3412.05,3397.26 3253.48,3555.83 3253.48,3578.7 3152.18,3680 3075,3680 3000,3755 2720.97,3755 2687.98,3722 2687.98,3189.98 U6.1@2653,3155 ; U6.1@2653,3155 2696,3155 2775,3076
NetR3_2: R3.2 U7.14 | length 163.2
  Top Layer w8: R3.2 3238,3017.52 3242.21,3021.73 U7.14
NetR5_1: R5.1 U6.2 U7.62 | length 2145
  Top Layer w8: v1(2702,3105) U6.2 2623,3105 2623,3117 2604,3136 2604,3655 2729.15,3780.15 3090.54,3780.15 3265.48,3605.22 3265.48,3580.68 3431.73,3414.43 U7.62 ; R5.1 v1(2927.52,2901)
  Bottom Layer w8: v1(2702,3105) 2730,3077 2812.5,3077 2827,3062.5 2827,3001.52 v1(2927.52,2901)
PWREN: U1.23 U2.23 U3.23 U4.23 U7.60 | length 7060.2
  Top Layer w8: U1.23 2911,4048.39 2910,4047.39 2910,3861 2894,3845 ; v1(3062,2178.39) U4.23 2938,2178.39 2915.39,2201 2912.5,2201 2896,2217.5 2896,2244.74 2914.27,2263 2914.27,2305.73 2496,2724 2496,2820.5 2379,2937.5 2379,3286 2515,3422 2515,3626 2705,3816 2865,3816 2894,3845 ; U7.60 3471.1,3412.9 3380,3504 3380,3575 3127,3828 2911,3828 2894,3845 ; v1(3669.11,2405) v1@3681.61,2417.5 ; U2.23 v1@3681.61,2417.5 ; U3.23 3948.39,3653 4003,3598.39 4003,3321 4031.5,3292.5 4162.5,3292.5 4176,3306 4176,3435 4177,3436 4233,3436 4234,3435 4234,3147 4181,3094 4181,2125 4180,2124 4131,2124 4130,2125 4130,2261 4003,2388 3700,2388 3681.61,2406.39 v1@3681.61,2417.5
  Bottom Layer w8: v1(3062,2178.39) 3104.27,2178.39 3283.89,2358 3622.11,2358 v1(3669.11,2405)
RI1: J1.9 U4.8 | length 640.3
  Top Layer w8: U4.8 2802.5,2127.2 v1(2815,2139.7)
  Bottom Layer w8: J1.9 2571.12,2383.58 v1(2815,2139.7)
RI2: J2.9 U2.8 | length 586.3
  Top Layer w8: U2.8 3732.8,2180 v1(3747.39,2165.41)
  Bottom Layer w8: v1(3747.39,2165.41) 3747.39,1812.5 3761.78,1798.11 J2.9
RI3: J3.9 U3.8 | length 907.1
  Top Layer w8: U3.8 3897.2,3879.92 3907.12,3870 3985,3870 3993.42,3861.58 4197.5,3861.58 4213.58,3877.66 J3.9
RI4: J4.9 U1.8 | length 658.9
  Top Layer w8: U1.8 2778.04,3997.2 v1(2825,4044.16)
  Bottom Layer w8: J4.9 2715.58,4153.58 v1(2825,4044.16)
RTS1: J1.7 U4.10 | length 963
  Top Layer w8: U4.10 v1(2905.76,2076.02)
  Bottom Layer w8: J1.7 2394,2109.58 2394,1950 2409,1935 2764.74,1935 v1(2905.76,2076.02)
RTS2: J2.7 U2.10 | length 718.7
  Top Layer w8: v1(3784,2114) U2.10
  Bottom Layer w8: v1(3784,2114) 3784,1886 3830,1840 4072.64,1840 J2.7
RTS3: J3.7 U3.10 | length 753.9
  Top Layer w8: U3.10 3846.02,4115.96 3778.62,4183.36 3778.62,4401.12 3834.66,4457.16 3930.2,4457.16 J3.7
RTS4: J4.7 U1.10 | length 404.1
  Top Layer w8: J4.7 2522,3935.47 2532.55,3946.02 U1.10
RXD1: J1.2 U4.4 | length 357
  Top Layer w8: J1.2 2568.54,2229.57 U4.4
RXD2: J2.2 U2.4 | length 799.2
  Top Layer w8: v1(3630,2180) 3630.43,2180.43 U2.4
  Bottom Layer w8: v1(3630,2180) 3648.76,2198.76 3762.5,2198.76 3778.89,2182.37 3778.89,2163.11 4006,1936 4006,1887 4025,1868 4127.13,1868 J2.2
RXD3: J3.2 U3.4 | length 838.3
  Top Layer w8: J3.2 4010.87,4350 4050.5,4350 4063,4362.5 4063,4412.5 4084.5,4434 4125,4434 4146,4413 4146,4350 4117,4321 4117,4148 3999.57,4030.57 U3.4
RXD4: J4.2 U1.4 | length 1403.8
  Top Layer w8: J4.2 2482,3838.87 2482,3731 2481,3730 2267.86,3730 2262,3735.86 2262,4201 2311,4250 2465.5,4250 2587.5,4128 2657.57,4128 2686,4099.57 U1.4
SHIELD: J1.10 J2.10 J3.10 J4.10 | length 6246.4
  Top Layer w8: J1.10 2280.31,1841.77 2280.31,3394.37 J4.10 2250,3632.09 2250,4208.11 2306.83,4264.94 2345.59,4264.94 2476.65,4396 3344.98,4396 3405,4335.98 J3.10
  Bottom Layer w8: J1.10 4425.98,1728.07 J2.10
SUSPEND: U1.22 U2.22 U3.22 U4.22 U7.36 | length 4509.8
  Top Layer w8: v1(2924.5,2153) 2924.7,2152.8 U4.22 ; U1.22 3248.8,4022.8 v1(3249,4023) ; v1(3720,2520) 3707.2,2507.2 U2.22 3707.2,2433.8 3741,2400 3915.5,2400 4016,2500.5 4016,2806 4000,2822 3962,2822 3950,2834 3950,2898 3923.5,2924.5 3923.24,2924.74 3795.58,3041.42 ; U7.36 3795.58,3041.42 ; v1(3918,2919) 3795.58,3041.42 ; v1(3922.8,3830) U3.22 3922.8,3638 3991,3569.8 3991,3379 3920,3308 3920,3076 3905.91,3061.91 3905.91,3020.95 3907,3019.86 3948.14,3019.86 v1(3983.5,2984.5)
  Bottom Layer w8: v1(2924.5,2153) 2924.5,2180.5 3080.6,2336.6 3080.6,2392.42 3236.18,2548 3692,2548 v1(3720,2520) ; v1(3249,4023) 3729.8,4023 v1(3922.8,3830) ; v1(3918,2919) v1(3983.5,2984.5)
TXD1: J1.3 U4.9 | length 356.9
  Top Layer w8: v1(2570,2101.61) U4.9
  Bottom Layer w8: J1.3 2568.31,2101.61 v1(2570,2101.61)
TXD2: J2.3 U2.9 | length 668.1
  Top Layer w8: v1(3758,2324.5) 3758.39,2324.11 U2.9
  Bottom Layer w8: v1(3758,2324.5) 3758,2269.09 3775,2252.09 3845.91,2252.09 4060,2038 J2.3
TXD3: J3.3 U3.9 | length 1021.4
  Top Layer w8: U3.9 3871.61,4159.01 3790.62,4240 3790.62,4382.78 3853,4445.16 3918.89,4445.16 3939.69,4424.36 3939.69,4338.62 3899,4297.94 3899,4251.5 3912.5,4238 4007.92,4238 J3.3
TXD4: J4.3 U1.9 | length 295.5
  Top Layer w8: J4.3 2574,3990 2592.39,3971.61 U1.9
VCC: C31.1 P1.1 U5.3 | length 1161.4
  Top Layer w8: C31.1 4378.5,2920 ; U5.3 4498.55,3270.55 4396,3168 4396,2937.5 4378.5,2920 ; P1.1 4736.8,2902.2 4719,2920 4378.5,2920
pads on no net: J1.11 J2.11 J3.11 J4.11 P1. U1.20 U1.21 U2.20 U2.21 U3.20 U3.21 U4.20 U4.21

## Polygon pours and split planes (outlines as drawn)
GND on InternalPlane1 (split plane): 6979.9,1020.1 1020.1,1020.1 1020.1,4979.9 6979.9,4979.9
3.3V on Internal Plane 2 (split plane): 6979.9,1020.1 1020.1,1020.1 1020.1,4979.9 6979.9,4979.9

## Text inside footprints (layer, text, board x,y; h text height)
J1: Top Overlay "6" at 2215.87,2036.73 h59.06 r90; Top Overlay "9" at 2215.87,2363.9 h59.06 r90; Top Overlay "5" at 2585,2440 h59.06 r90; Top Overlay "1" at 2585,1970 h59.06 r90
J2: Top Overlay "6" at 4243.27,1675.87 h59.06 r180; Top Overlay "9" at 3916.1,1675.87 h59.06 r180; Top Overlay "5" at 3861.57,2045.94 h59.06 r180; Top Overlay "1" at 4287.95,2045.94 h59.06 r180
J3: Top Overlay "6" at 3866.73,4514.13 h59.06; Top Overlay "9" at 4193.9,4514.13 h59.06; Top Overlay "5" at 4248.43,4144.06 h59.06; Top Overlay "1" at 3822.05,4144.06 h59.06
J4: Top Overlay "6" at 2205.87,3806.73 h59.06 r90; Top Overlay "9" at 2205.87,4133.9 h59.06 r90; Top Overlay "5" at 2520,4215 h59.06; Top Overlay "1" at 2575.94,3762.05 h59.06 r90